# EAGLE board UMR2-cradle (EAGLE 6.6.0)
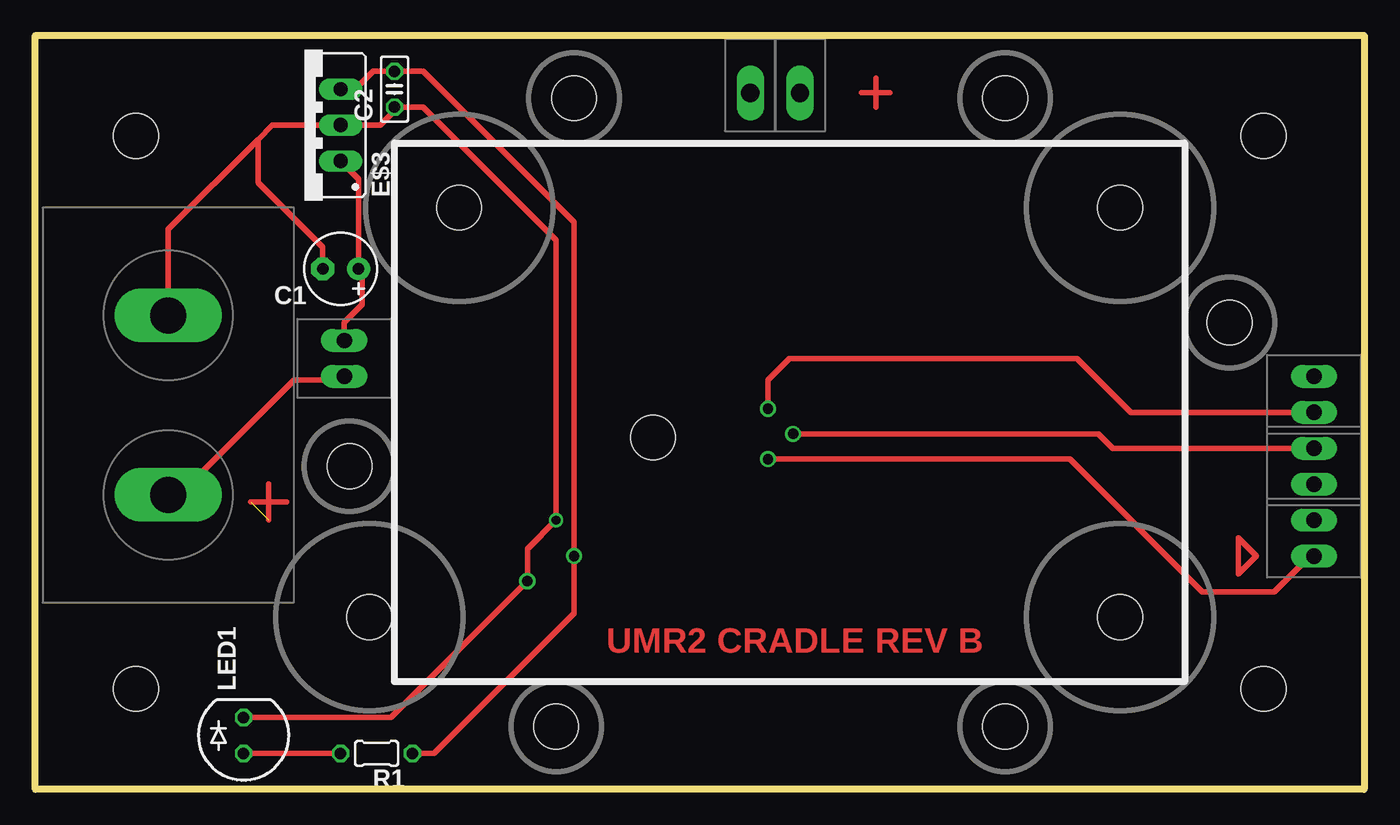
[diagram p0: board, top side]
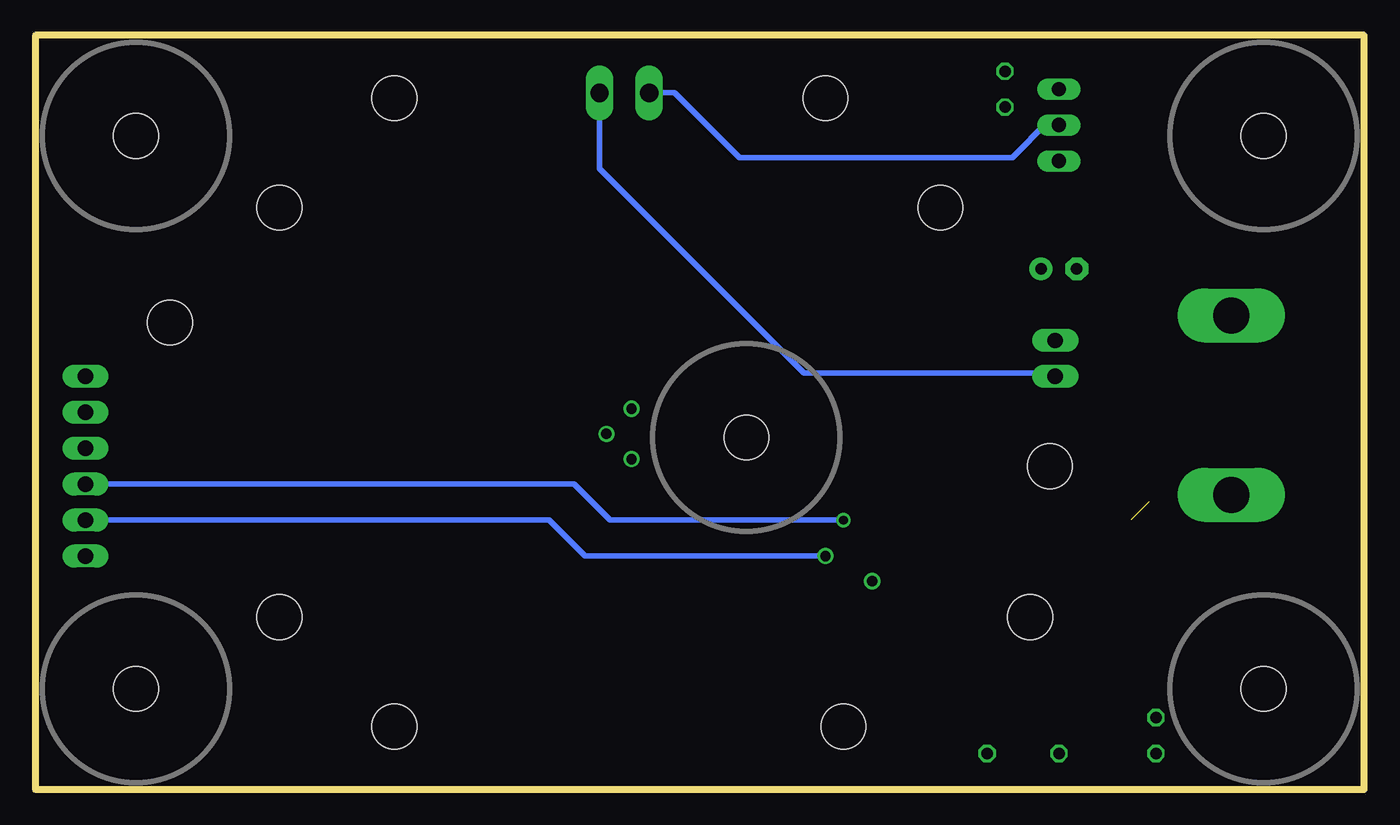
[diagram p1: board, bottom side, seen from below]

Size 93.98 x 53.34 mm. Coordinates in mm from the lower left corner, seen from the top.
Outline: 0,0 0,53.34 93.98,53.34 93.98,0 0,0
Copper layers (1*16): Top 0.0178mm / dielectric 59mil / Bottom 0.0178mm
Design rules "SSC-EAGLE-2Lyr_v1.0.0.3": minimum track width 10mil, minimum drill 14mil, track to track 10mil, track to pad 10mil, pad to pad 10mil, via to via 10mil, smd to smd 10mil, copper to edge 40mil, drill to drill 16mil, minimum pad ring 8mil, minimum via ring 8mil, stop-mask expansion 3mil, vias tented up to drill 0mil, thermal gap 10mil
Net classes: 0 default: width 0.254 mm, drill 0.305 mm, clearance 0.254 mm; 2 superfat: width 0.61 mm, drill 0.406 mm, clearance 0.762 mm; 3 grounder: width 0.254 mm, drill 0.508 mm, clearance 0.254 mm
Holes 3.17 mm at 76.71,41.15 29.97,41.15 76.71,12.19 23.62,12.19 22.22,22.86 84.45,33.02 38.1,48.89 68.58,48.89 86.87,7.11 86.87,46.23 7.11,7.11 7.11,46.23 43.69,24.89 36.83,4.45 68.58,4.45

## Footprints (pad centres in the part's own frame; a part is rotated, then mirrored left to right if it is on the bottom)
STUD9V = drill 2.54 long: P$1 -6.35,0; P$2 6.35,0
E2,5-5 = drill 0.813 pad 1.6: + -1.27,0 | drill 0.813 pad 1.6 octagon: - 1.27,0
C025-025X050 = drill 0.813 octagon: 1 -1.27,0; 2 1.27,0
TERMINAL-BLOCK-3-5-2POS = drill 1.3 long: P$1 1.75,0; P$2 -1.75,0
78XXS = drill 1.016 long: GND 0,-2.54; IN -2.54,-2.54; OUT 2.54,-2.54
SPRING-CONTACT-025 = drill 0.737: P$1 0,0
TB-2-54-2POS = drill 1.092 long: P$1 1.27,0; P$3 -1.27,0
LED5MM = drill 0.813 octagon: A -1.27,0; K 1.27,0
0204/5 = drill 0.813 octagon: 1 -2.54,0; 2 2.54,0

## Placement (x,y rotation side)
BAT  [STUD9V]  9.4,27.18 90 top
C1  [E2,5-5]  21.59,36.83 180 top
C2  [C025-025X050]  25.4,49.53 90 top
E$2  [TERMINAL-BLOCK-3-5-2POS]  52.32,49.28 180 top
E$3  [78XXS]  19.05,46.99 90 top
E$5  [SPRING-CONTACT-025]  51.82,26.92 0 top
E$6  [SPRING-CONTACT-025]  53.59,25.15 0 top
E$7  [SPRING-CONTACT-025]  51.82,23.37 0 top
E$8  [SPRING-CONTACT-025]  38.1,16.51 0 top
E$9  [SPRING-CONTACT-025]  34.8,14.73 0 top
E$15  [TB-2-54-2POS]  21.84,30.48 270 top
E$47  [TB-2-54-2POS]  90.42,27.94 270 top
E$48  [TB-2-54-2POS]  90.42,22.86 270 top
E$49  [TB-2-54-2POS]  90.42,17.78 270 top
LED1  [LED5MM]  14.73,3.81 90 top
R1  [0204/5]  24.13,2.54 180 top

## Library data of the parts
BAT E$2 E$5-E$9 E$15 E$47-E$49 LED1 = 0jrs
C1 C2 R1 = rcl
E$3 = v-reg

## Nets
DATA5: E$47.P$3
GND: BAT.P$2 C1.- C2.1 E$2.P$1 E$3.GND E$9.P$1 E$48.P$1 LED1.K
ICSPCLK: E$5.P$1 E$47.P$1
ICSPDAT: E$6.P$1 E$48.P$3
S$3: C1.+ E$3.IN E$15.P$3
S$4: BAT.P$1 E$2.P$2 E$15.P$1
S$8: LED1.A R1.2
VDD: C2.2 E$3.OUT E$8.P$1 E$49.P$3 R1.1
VPP: E$7.P$1 E$49.P$1

## Tracks (layer width: path | path; a pad name or v marks a point on that pad's centre or on a via)
DOCCOPPER  (1 unrouted)
  Top 0.406: 16.51,19.05 16.51,21.59 | 15.24,20.32 17.78,20.32
GND  (via drill 0.61)
  Top 0.406: BAT.P$2 9.4,39.62 15.75,45.97 | 15.75,45.97 16.76,46.99 E$3.GND 24.38,46.99 25.4,48.01 C2.1 27.43,48.26 36.83,38.86 v36.83,19.05 34.8,17.02 34.8,14.99 34.54,14.73 E$9.P$1 25.15,5.08 LED1.K | C1.- 20.32,38.35 15.75,42.93 15.75,45.97
  Bottom 0.406: E$48.P$1 55.88,21.59 53.34,19.05 v36.83,19.05 | E$2.P$1 48.77,49.28 44.2,44.7 24.89,44.7 22.35,47.24 21.84,47.24 E$3.GND
ICSPCLK
  Top 0.406: E$5.P$1 51.82,28.96 53.34,30.48 73.66,30.48 77.47,26.67 E$47.P$1
ICSPDAT
  Top 0.406: E$6.P$1 75.18,25.15 76.2,24.13 E$48.P$3
S$1
  Top 0.406: 85.09,17.78 86.36,16.51 85.09,15.24 85.09,17.78
S$3
  Top 0.406: E$15.P$3 21.84,33.02 23.11,34.29 23.11,36.58 C1.+ 22.86,43.18 E$3.IN
S$4
  Top 0.406: BAT.P$1 10.16,20.83 18.29,28.96 21.59,28.96 E$15.P$1
  Bottom 0.406: E$2.P$2 54.07,43.91 39.62,29.46 22.35,29.46 21.84,28.96 E$15.P$1
S$5
  Top 0.406: 60.45,49.28 58.42,49.28
S$7
  Top 0.406: 59.44,48.26 59.44,50.29
S$8
  Top 0.406: R1.2 LED1.A
VDD
  Top 0.406: E$3.OUT 22.61,49.53 23.88,50.8 C2.2 | C2.2 25.65,50.55 | C2.2 27.43,50.8 38.1,40.13 E$8.P$1 38.1,12.45 28.19,2.54 R1.1
  Bottom 0.406: E$49.P$3 57.66,19.05 55.12,16.51 E$8.P$1
VPP
  Top 0.406: E$7.P$1 73.15,23.37 82.55,13.97 87.63,13.97 90.17,16.51 E$49.P$1

## Text on the board
Top: UMR2 CRADLE REV B
Document: UMR2 Programming Cradle / / copyright John Staskevich, 2017 / / john@codeandcopper.com / / / This work is licensed under a Creative Commons Attribution 4.0 International License. / http://creativecommons.org/licenses/by/4.0/